# EAGLE board transceiver - Copy (EAGLE 6.4)
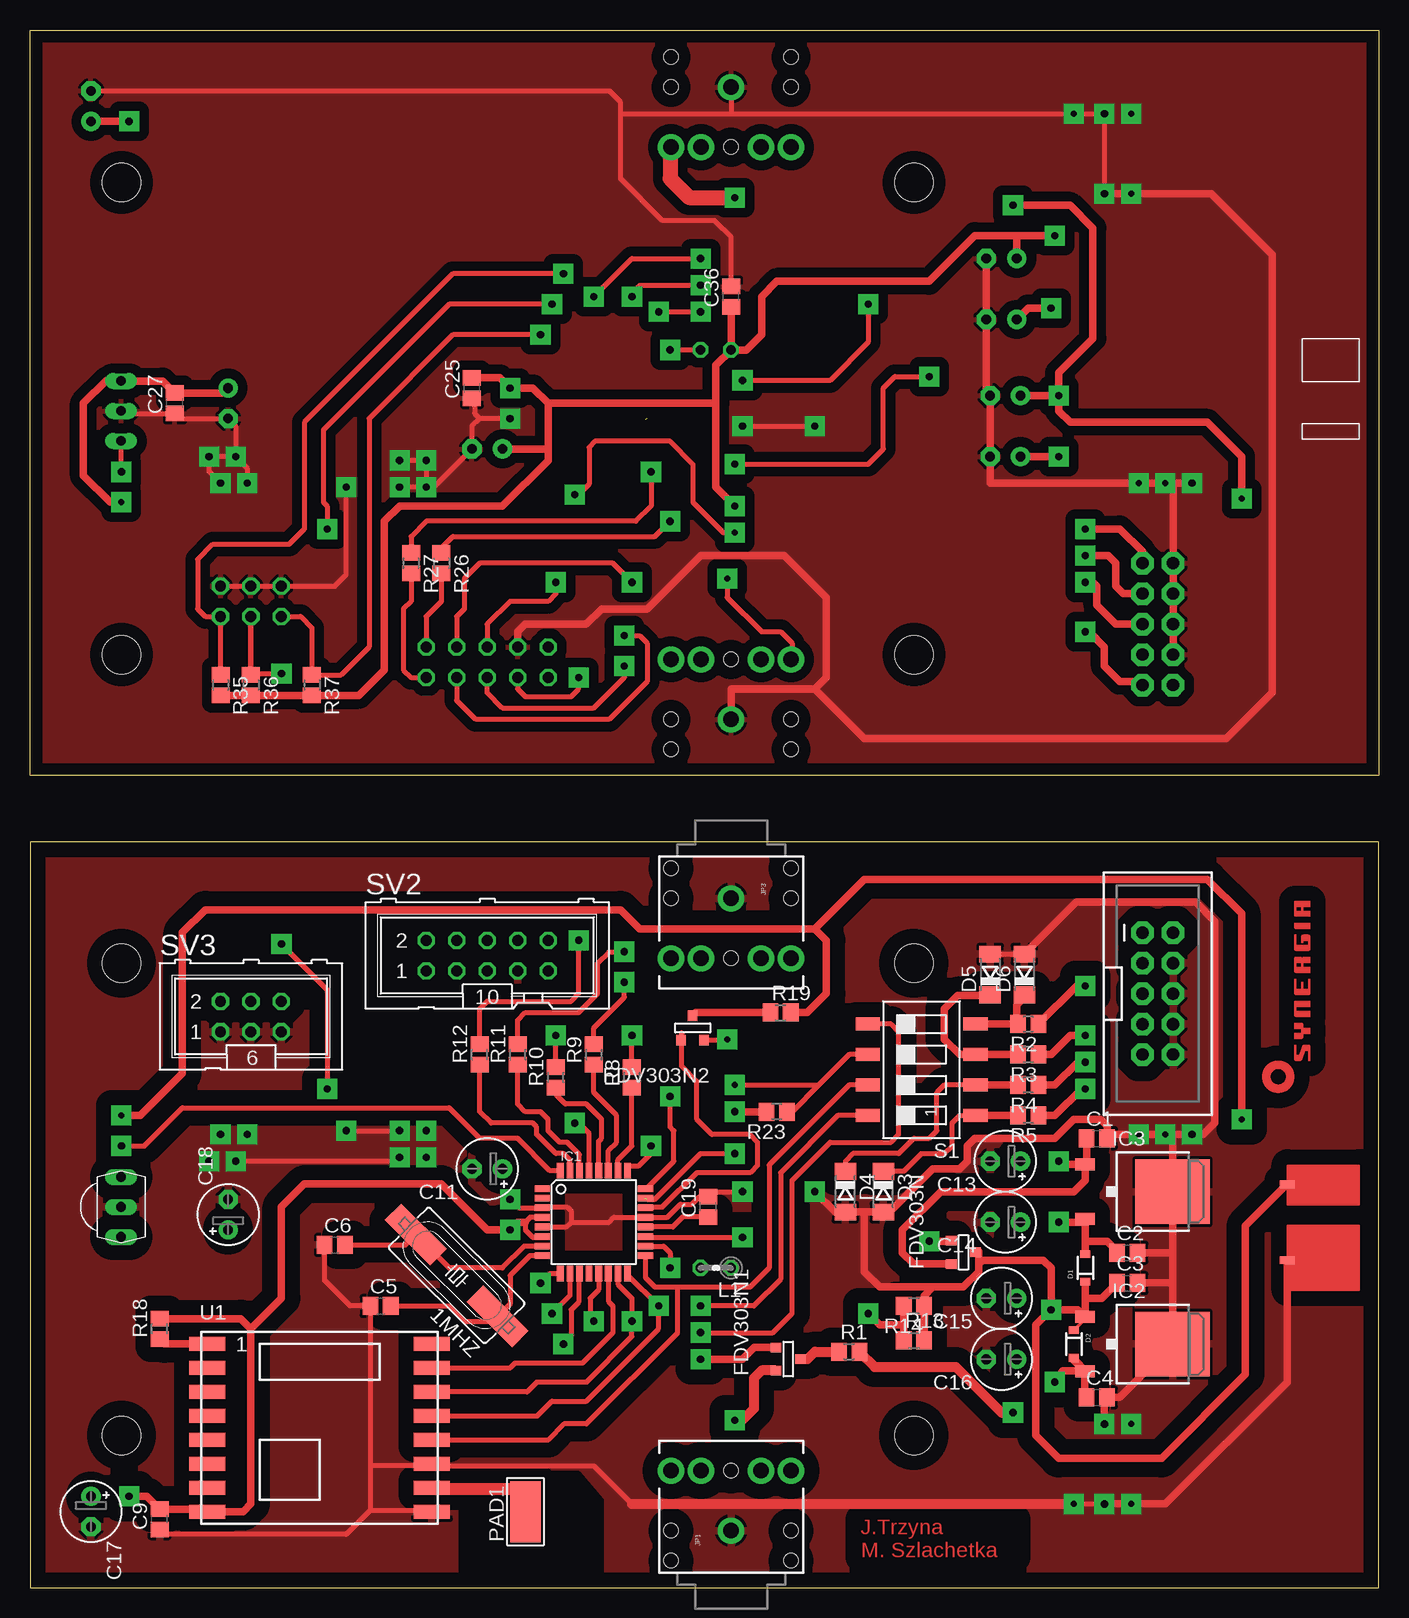
[diagram p0: board, top side]
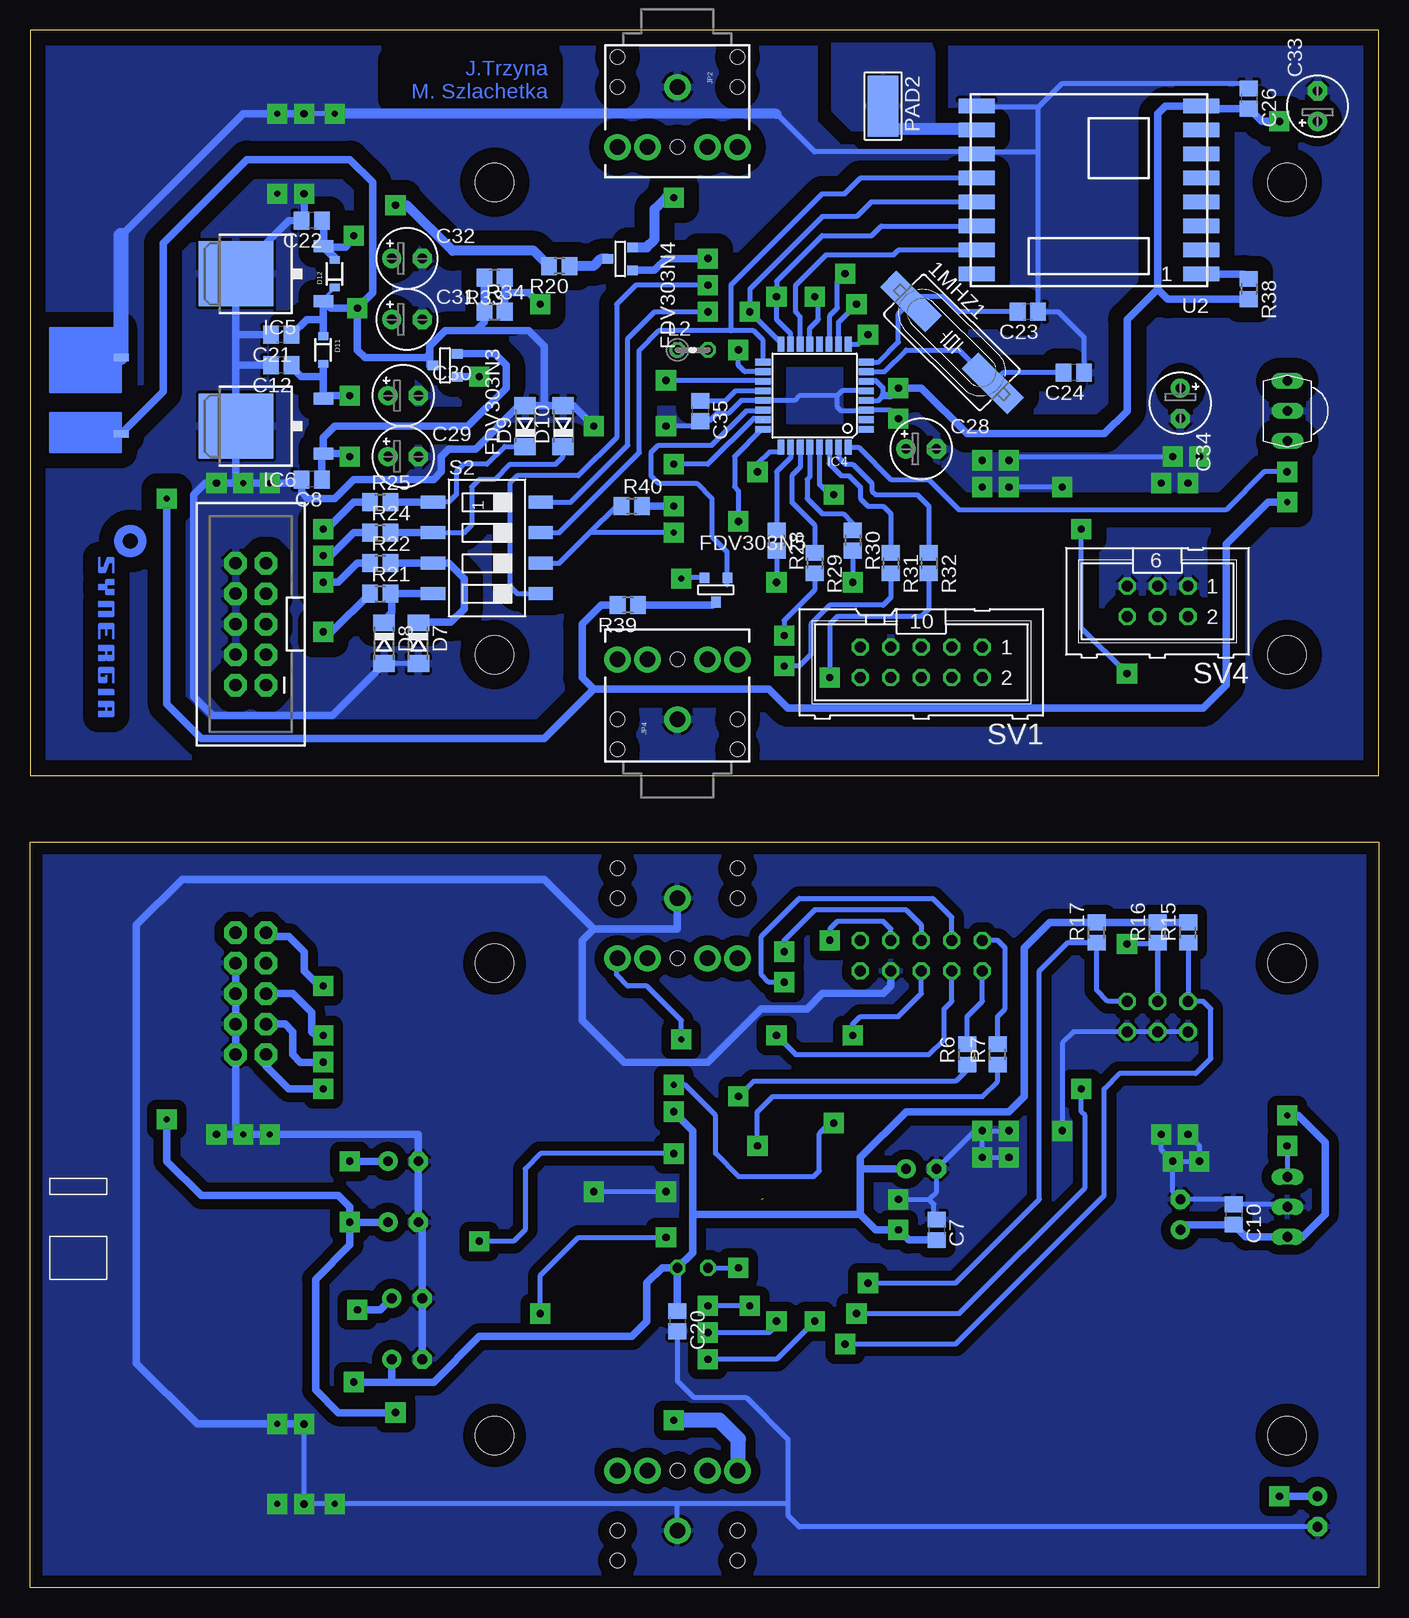
[diagram p1: board, bottom side, seen from below]

Size 112.38 x 129.86 mm. Coordinates in mm from the lower left corner, seen from the top.
Outline: 0,0 112.38,0 112.38,62.15 0,62.15 0,0
Outline: 0,129.86 112.38,129.86 112.38,67.7 0,67.7 0,129.86
Copper layers (1*16): Top 0.035mm / dielectric 1.5mm / Bottom 0.035mm
Design rules "default": minimum track width 10mil, minimum drill 24mil, track to track 8mil, track to pad 8mil, pad to pad 8mil, via to via 8mil, smd to smd 8mil, copper to edge 40mil, drill to drill 8mil, minimum pad ring 10mil, minimum via ring 8mil, stop-mask expansion 4mil, vias tented up to drill 0mil, thermal gap 10mil
Holes 3.2 mm at 7.62,52.07 7.62,12.7 73.66,12.7 73.66,52.07 7.62,77.79 7.62,117.16 73.66,117.16 73.66,77.79

## Footprints (pad centres in the part's own frame; a part is rotated, then mirrored left to right if it is on the bottom)
HC49UP = smd 5.334 x 1.93: 1 -4.826,0; 2 4.826,0
C0805 = smd 1.3 x 1.5: 1 -0.85,0; 2 0.85,0
E2,5-5 = drill 0.813 pad 1.6: + -1.27,0 | drill 0.813 pad 1.6 octagon: - 1.27,0
SOD-323 = smd 0.63 x 0.83: 1 -1.15,0; 2 1.15,0
SOD80C = smd 1.4 x 1.8: A 1.7,0; C -1.7,0
SOT-23 = smd 0.787 x 0.889: 1 0.025,-1.016; 2 -0.94,1.016; 3 0.991,1.016
TQFP32-08 = smd 1.27 x 0.559: 1 -4.293,2.8; 2 -4.293,2; 3 -4.293,1.2; 4 -4.293,0.4; 5 -4.293,-0.4; 6 -4.293,-1.2; 7 -4.293,-2; 8 -4.293,-2.8; 17 4.293,-2.8; 18 4.293,-2; 19 4.293,-1.2; 20 4.293,-0.4; 21 4.293,0.4; 22 4.293,1.2; 23 4.293,2; 24 4.293,2.8 | smd 0.559 x 1.27: 9 -2.8,-4.293; 10 -2,-4.293; 11 -1.2,-4.293; 12 -0.4,-4.293; 13 0.4,-4.293; 14 1.2,-4.293; 15 2,-4.293; 16 2.8,-4.293; 25 2.8,4.293; 26 2,4.293; 27 1.2,4.293; 28 0.4,4.293; 29 -0.4,4.293; 30 -1.2,4.293; 31 -2,4.293; 32 -2.8,4.293
TO252 = smd 1 x 1.6: 1 -2.28,-4.8; 2 2.28,-4.8 | smd 5.4 x 6.2: 3 0,2.5
AUDIO-JACK = drill 1.3 pad 2.184: RING 5,5; RSH 5,2.5; SLEEVE 0,0; TIP 5,-5; TSH 5,-2.5 | hole 1.2: 0,5; -2.5,5; -2.5,-5; 0,-5; 5,0
0204V = drill 0.813 octagon: 1 -1.27,0; 2 1.27,0
5-2,5 = smd 2.54 x 5.08: 1 0,0
R0805 = smd 1.3 x 1.5: 1 -0.85,0; 2 0.85,0
SMS-004 = smd 1.092 x 2.007: 1 -3.81,-4.496; 2 -1.27,-4.496; 3 1.27,-4.496; 4 3.81,-4.496; 5 3.81,4.496; 6 1.27,4.496; 7 -1.27,4.496; 8 -3.81,4.496
ML10 = drill 0.914 octagon: 1 -5.08,-1.27; 2 -5.08,1.27; 3 -2.54,-1.27; 4 -2.54,1.27; 5 0,-1.27; 6 0,1.27; 7 2.54,-1.27; 8 2.54,1.27; 9 5.08,-1.27; 10 5.08,1.27
ML6 = drill 0.914 octagon: 1 -2.54,-1.27; 2 -2.54,1.27; 3 0,-1.27; 4 0,1.27; 5 2.54,-1.27; 6 2.54,1.27
TSOP18XX = drill 0.813 long: GND -0.001,-0.027; OUT -2.501,-0.027; VCC 2.499,-0.027
RFM69W-XXXS2 = smd 3 x 1.2: 1 -9.35,7; 2 -9.35,5; 3 -9.35,3; 4 -9.35,1; 5 -9.35,-1; 6 -9.35,-3; 7 -9.35,-5; 8 -9.35,-7; 9 9.35,-7; 10 9.35,-5; 11 9.35,-3; 12 9.35,-1; 13 9.35,1; 14 9.35,3; 15 9.35,5; 16 9.35,7
DEANSM = smd 1.27 x 0.635: P$NEG 3.175,3.81; P$POS 3.175,-2.54
2X5-SHROUDED = drill 1.016 pad 1.88 octagon: 1 -1.27,5.08; 2 1.27,5.08; 3 -1.27,2.54; 4 1.27,2.54; 5 -1.27,0; 6 1.27,0; 7 -1.27,-2.54; 8 1.27,-2.54; 9 -1.27,-5.08; 10 1.27,-5.08

## Placement (x,y rotation side)
1MHZ  [HC49UP]  35.56,26.04 135 top
1MHZ1  [HC49UP]  35.56,103.82 315 bottom
C1  [C0805]  88.9,37.46 0 top
C2  [C0805]  91.44,27.94 0 top
C3  [C0805]  91.44,25.4 0 top
C4  [C0805]  88.9,15.88 0 top
C5  [C0805]  29.21,23.49 0 top
C6  [C0805]  25.4,28.57 0 top
C7  [C0805]  36.83,29.84 270 bottom
C8  [C0805]  88.9,92.39 180 bottom
C9  [C0805]  10.79,5.71 90 top
C10  [C0805]  12.06,31.11 270 bottom
C11  [E2,5-5]  38.1,34.92 180 top
C12  [C0805]  91.44,101.92 180 bottom
C13  [E2,5-5]  81.28,35.56 180 top
C14  [E2,5-5]  81.28,30.48 180 top
C15  [E2,5-5]  80.96,24.13 180 top
C16  [E2,5-5]  80.96,19.05 180 top
C17  [E2,5-5]  5.08,6.35 270 top
C18  [E2,5-5]  16.51,31.11 90 top
C19  [C0805]  56.52,31.75 90 top
C20  [C0805]  58.42,22.22 270 bottom
C21  [C0805]  91.44,104.46 180 bottom
C22  [C0805]  88.9,113.98 180 bottom
C23  [C0805]  29.21,106.36 180 bottom
C24  [C0805]  25.4,101.28 180 bottom
C25  [C0805]  36.83,100.01 90 top
C26  [C0805]  10.79,124.14 270 bottom
C27  [C0805]  12.06,98.74 90 top
C28  [E2,5-5]  38.1,94.93 0 bottom
C29  [E2,5-5]  81.28,94.3 0 bottom
C30  [E2,5-5]  81.28,99.38 0 bottom
C31  [E2,5-5]  80.96,105.73 0 bottom
C32  [E2,5-5]  80.96,110.81 0 bottom
C33  [E2,5-5]  5.08,123.51 90 bottom
C34  [E2,5-5]  16.51,98.74 270 bottom
C35  [C0805]  56.52,98.11 270 bottom
C36  [C0805]  58.42,107.63 90 top
D1  BAS16HT1G  [SOD-323]  87.95,26.67 90 top
D2  BAS16HT1G  [SOD-323]  87,20.32 270 top
D3  [SOD80C]  71.12,33.02 270 top
D4  [SOD80C]  67.94,33.02 270 top
D5  [SOD80C]  80.01,51.12 90 top
D6  [SOD80C]  82.87,51.12 90 top
D7  [SOD80C]  80.01,78.74 270 bottom
D8  [SOD80C]  82.87,78.74 270 bottom
D9  [SOD80C]  71.12,96.84 90 bottom
D10  [SOD80C]  67.94,96.84 90 bottom
D11  BAS16HT1G  [SOD-323]  87.95,103.19 270 bottom
D12  BAS16HT1G  [SOD-323]  87,109.54 90 bottom
FDV303N  [SOT-23]  77.79,27.94 90 top
FDV303N1  [SOT-23]  63.18,19.05 90 top
FDV303N2  [SOT-23]  55.24,46.67 180 top
FDV303N3  [SOT-23]  77.79,101.92 270 bottom
FDV303N4  [SOT-23]  63.18,110.81 270 bottom
FDV303N5  [SOT-23]  55.24,83.19 0 bottom
IC1  MEGA8-AI  [TQFP32-08]  46.99,30.48 0 top
IC2  LF33  [TO252]  92.71,20.32 270 top
IC3  LF50  [TO252]  92.71,33.02 270 top
IC4  MEGA8-AI  [TQFP32-08]  46.99,99.38 180 bottom
IC5  LF33  [TO252]  92.71,109.54 90 bottom
IC6  LF50  [TO252]  92.71,96.84 90 bottom
JP1  [AUDIO-JACK]  58.42,4.76 90 top
JP2  [AUDIO-JACK]  58.42,125.1 270 bottom
JP3  [AUDIO-JACK]  58.42,57.47 270 top
JP4  [AUDIO-JACK]  58.42,72.39 90 bottom
L1  [0204V]  57.15,26.67 180 top
L2  [0204V]  57.15,103.19 0 bottom
PAD1  WIREPADSMD5-2,5  [5-2,5]  41.27,6.35 0 top
PAD2  WIREPADSMD5-2,5  [5-2,5]  41.27,123.51 180 bottom
R1  36,5R  [R0805]  68.26,19.68 0 top
R2  [R0805]  83.19,46.99 180 top
R3  [R0805]  83.19,44.45 180 top
R4  [R0805]  83.19,41.91 180 top
R5  [R0805]  83.19,39.37 180 top
R6  [R0805]  34.29,44.45 90 bottom
R7  [R0805]  31.75,44.45 90 bottom
R8  [R0805]  50.16,42.55 90 top
R9  [R0805]  46.99,44.45 90 top
R10  [R0805]  43.81,42.55 90 top
R11  [R0805]  40.64,44.45 90 top
R12  [R0805]  37.47,44.45 90 top
R13  10k  [R0805]  73.66,20.64 0 top
R14  3,6k  [R0805]  73.66,23.49 180 top
R15  1k  [R0805]  15.88,54.61 90 bottom
R16  1k  [R0805]  18.41,54.61 90 bottom
R17  1k  [R0805]  23.5,54.61 90 bottom
R18  10k  [R0805]  10.79,21.59 90 top
R19  [R0805]  62.55,47.94 0 top
R20  36,5R  [R0805]  68.26,110.17 180 bottom
R21  [R0805]  83.19,82.87 0 bottom
R22  [R0805]  83.19,85.41 0 bottom
R23  1k  [R0805]  62.23,39.69 180 top
R24  [R0805]  83.19,87.95 0 bottom
R25  [R0805]  83.19,90.49 0 bottom
R26  [R0805]  34.29,85.41 270 top
R27  [R0805]  31.75,85.41 270 top
R28  [R0805]  50.16,87.31 270 bottom
R29  [R0805]  46.99,85.41 270 bottom
R30  [R0805]  43.81,87.31 270 bottom
R31  [R0805]  40.64,85.41 270 bottom
R32  [R0805]  37.47,85.41 270 bottom
R33  10k  [R0805]  73.66,109.22 180 bottom
R34  3,6k  [R0805]  73.66,106.36 0 bottom
R35  1k  [R0805]  15.88,75.25 270 top
R36  1k  [R0805]  18.41,75.25 270 top
R37  1k  [R0805]  23.5,75.25 270 top
R38  10k  [R0805]  10.79,108.27 270 bottom
R39  [R0805]  62.55,81.92 180 bottom
R40  1k  [R0805]  62.23,90.17 0 bottom
S1  SWS004  [SMS-004]  74.3,43.18 90 top
S2  SWS004  [SMS-004]  74.3,86.68 270 bottom
SV1  [ML10]  38.1,77.15 180 bottom
SV2  [ML10]  38.1,52.7 0 top
SV3  [ML6]  18.41,47.62 0 top
SV4  [ML6]  18.41,82.23 180 bottom
TSOP  TSOP4836  [TSOP18XX]  7.62,31.75 270 top
TSOP1  TSOP4836  [TSOP18XX]  7.62,98.11 90 bottom
U1  RFM69HW  [RFM69W-XXXS2]  24.13,13.34 0 top
U2  RFM69HW  [RFM69W-XXXS2]  24.13,116.52 180 bottom
U$1  DEANS.MALE  [DEANSM]  107.95,31.11 180 top
U$2  AVR_SPI_PROG2PTH2  [2X5-SHROUDED]  93.98,49.53 0 top
U$3  [SYNERGIA_16MM]  106.68,41.27 90 top
U$4  DEANS.MALE  [DEANSM]  107.95,98.74 0 bottom
U$5  AVR_SPI_PROG2PTH2  [2X5-SHROUDED]  93.98,80.33 180 bottom
U$6  [SYNERGIA_16MM]  106.68,88.58 270 bottom

## Library data of the parts
1MHZ 1MHZ1 = crystal; OC_FARNELL: unknown; OC_NEWARK: unknown
C1-C10 C12 C19-C27 C35 C36 L1 L2 R1-R40 = resistor
C11 C13-C18 C28-C34 = rcl
D1 D2 D11 D12 U$2 U$5 = SparkFun
D3-D10 = diode
FDV303N FDV303N1-FDV303N5 = zetex; OC_FARNELL: unknown; OC_NEWARK: unknown
IC1 IC4 = atmel; MPN: ATMEGA8-16AU; OC_FARNELL: 9171371; OC_NEWARK: 73M8863
IC2 IC3 IC5 IC6 = linear
JP1-JP4 = SparkFun-Connectors
PAD1 PAD2 = wirepad
S1 S2 = smd-special
SV1-SV4 = con-harting-ml; OC_FARNELL: unknown; OC_NEWARK: unknown
TSOP TSOP1 = tsop
U1 U2 = SparkFun-RF
U$1 U$4 = bt_electromech
U$3 U$6 = synergia_logo

## Nets
5V_ENABLE: FDV303N.3 IC1.23
5V_ENABLE1: FDV303N3.3 IC4.23
$1S1: C1.2 C2.2 C3.2 C4.2 C5.1 C6.1 C7.1 C9.1 C10.1 C11.- C13.- C14.- C15.- C16.- C17.- C18.- C19.2 C20.2 D3.A D4.A D5.A D6.A IC1.3 IC1.5 IC1.21 IC2.3 IC3.3 JP1.SLEEVE JP3.SLEEVE R14.1 SV2.7 SV3.1 SV3.3 SV3.5 TSOP.GND U1.9 U1.11 U$1.P$NEG U$2.4 U$2.6 U$2.8 U$2.10
$1S2: C8.2 C12.2 C21.2 C22.2 C23.1 C24.1 C25.1 C26.1 C27.1 C28.- C29.- C30.- C31.- C32.- C33.- C34.- C35.2 C36.2 D7.A D8.A D9.A D10.A IC4.3 IC4.5 IC4.21 IC5.3 IC6.3 JP2.SLEEVE JP4.SLEEVE R34.1 SV1.7 SV4.1 SV4.3 SV4.5 TSOP1.GND U2.9 U2.11 U$4.P$NEG U$5.4 U$5.6 U$5.8 U$5.10
+3V1: C22.1 C25.2 C26.2 C28.+ C32.+ C33.+ C36.1 D12.2 IC4.4 IC4.6 IC5.2 L2.1 R35.2 R36.2 R37.2 R38.2 R40.2 U2.8
+3V3: C4.1 C7.2 C9.2 C11.+ C16.+ C17.+ C20.1 D2.2 IC1.4 IC1.6 IC2.2 L1.1 R15.2 R16.2 R17.2 R18.2 R23.2 U1.8
+5V: C2.1 C10.2 C14.+ C18.+ D1.2 IC3.2 R1.2 R19.2 TSOP.VCC
+5V1: C12.1 C27.2 C30.+ C34.+ D11.2 IC6.2 R20.2 R39.2 TSOP1.VCC
ADC: IC1.19 R13.1 R14.2
ADC1: IC4.19 R33.1 R34.2
LED1: IC1.24 R6.1
LED2: IC1.25 R7.1
LED3: IC1.26 R8.1
LED4: IC1.27 R9.1
LED5: IC1.28 R10.1
LED6: IC4.24 R26.1
LED7: IC4.25 R27.1
LED8: IC4.26 R28.1
LED9: IC4.27 R29.1
LED10: IC4.28 R30.1
LED_BATT_GR: IC1.30 R11.1
LED_BATT_GR1: IC4.30 R31.1
LED_BATT_RED: IC1.31 R12.1
LED_BATT_RED1: IC4.31 R32.1
LED_STRIPE: FDV303N2.3 IC1.22
LED_STRIPE1: FDV303N5.3 IC4.22
MISO: IC1.16 S1.8 U1.13
MISO1: IC4.16 S2.8 U2.13
MOSI: IC1.15 S1.5 U1.14
MOSI1: IC4.15 S2.5 U2.14
N$1: C1.1 C13.+ FDV303N.2 IC3.1
N$2: IC1.18 L1.2
N$3: C8.1 C29.+ FDV303N3.2 IC6.1
N$4: R2.1 U$2.1
N$5: R3.1 U$2.5
N$6: R4.1 U$2.7
N$7: R5.1 U$2.9
N$8: FDV303N1.1 R1.1
N$9: R6.2 SV2.1
N$10: R7.2 SV2.2
N$11: R8.2 SV2.3
N$12: R9.2 SV2.4
N$13: R10.2 SV2.5
N$14: 1MHZ.2 C6.2 IC1.7
N$15: 1MHZ.1 C5.2 IC1.8
N$16: R11.2 SV2.6
N$17: R12.2 SV2.8
N$19: R21.1 U$5.1
N$20: R22.1 U$5.5
N$21: R18.1 U1.1
N$22: R24.1 U$5.7
N$23: FDV303N1.2 JP1.RING
N$24: FDV303N2.2 JP3.RING
N$25: FDV303N2.1 R19.1
N$26: C19.1 IC1.20
N$27: C3.1 C15.+ D1.1 D2.1 FDV303N.1 IC2.1 R13.2 U$1.P$POS
N$28: PAD1.1 U1.10
N$29: D6.C R2.2 S1.4
N$30: D5.C R3.2 S1.3
N$31: D4.C R4.2 S1.2
N$32: D3.C R5.2 S1.1
N$33: R25.1 U$5.9
N$34: 1MHZ1.2 C24.2 IC4.7
N$35: 1MHZ1.1 C23.2 IC4.8
N$36: R38.1 U2.1
N$37: FDV303N4.2 JP2.RING
N$38: FDV303N5.2 JP4.RING
N$39: FDV303N5.1 R39.1
N$40: FDV303N4.1 R20.1
N$41: C21.1 C31.+ D11.1 D12.1 FDV303N3.1 IC5.1 R33.2 U$4.P$POS
N$42: IC4.18 L2.2
N$43: C35.1 IC4.20
N$44: PAD2.1 U2.10
N$45: R26.2 SV1.1
N$46: R27.2 SV1.2
N$47: R28.2 SV1.3
N$48: R29.2 SV1.4
N$49: R30.2 SV1.5
N$50: R31.2 SV1.6
N$51: R32.2 SV1.8
N$52: D8.C R21.2 S2.4
N$53: D7.C R22.2 S2.3
N$54: D10.C R24.2 S2.2
N$55: D9.C R25.2 S2.1
RESET: IC1.29 R23.1 S1.6
RESET1: IC4.29 R40.1 S2.6
SCK: IC1.17 S1.7 U1.12
SCK1: IC4.17 S2.7 U2.12
SS: IC1.14 U1.15
SS1: IC4.14 U2.15
SWITCH_DOWN: IC1.11 R15.1 SV3.2
SWITCH_DOWN1: IC4.11 R35.1 SV4.2
SWITCH_OK: IC1.10 R16.1 SV3.4
SWITCH_OK1: IC4.10 R36.1 SV4.4
SWITCH_UP: IC1.9 R17.1 SV3.6
SWITCH_UP1: IC4.9 R37.1 SV4.6
TSAL_ENABLE: FDV303N1.3 IC1.13
TSAL_ENABLE1: FDV303N4.3 IC4.13
TSOP_OUT: IC1.32 TSOP.OUT
TSOP_OUT1: IC4.32 TSOP1.OUT

## Tracks (layer width: path | path; a pad name or v marks a point on that pad's centre or on a via)
5V_ENABLE  (via drill 0.6 pad 1.68)  (1 unrouted)
  Top 0.254: 51.38,32.38 51.44,32.38
  Top 0.406: 51.44,32.38 52.07,32.38 55.88,36.2 v58.74,36.2
  Top 0.61: FDV303N.3 76.73,28.89 v74.93,28.89
  Bottom 0.406: v58.74,36.2 69.85,36.2 71.12,34.92 71.12,29.84 72.07,28.89 v74.93,28.89
5V_ENABLE1  (via drill 0.6 pad 1.68)  (1 unrouted)
  Top 0.406: v58.74,93.66 69.85,93.66 71.12,94.93 71.12,100.01 72.07,100.97 v74.93,100.97
  Bottom 0.254: 51.38,97.47 51.44,97.47
  Bottom 0.406: 51.44,97.47 52.07,97.47 55.88,93.66 v58.74,93.66
  Bottom 0.61: FDV303N3.3 76.73,100.97 v74.93,100.97
$1S1  (via drill 0.5 pad 1.68, 0.6 pad 1.68)
  Top 0.254: 90.13,16.51 C4.2 | IC1.3 42.77,31.75 | 40.64,31.75 40.71,31.68
  Top 0.305: IC3.3 95.21,31.75 | 93.94,20.32 IC2.3 | 56.73,33.02 C19.2 55.78,32.6 | 33.3,10.16 U1.11 33.66,10.16 | 11.21,4.45 C9.1 | 33.36,6.45 U1.9
  Top 0.406: 45.09,30.48 48.26,30.48 48.66,30.88 IC1.21 53.1,30.88 54.19,31.96 55.14,31.96 55.78,32.6 | 40.71,31.68 IC1.3 | 56.73,33.02 v59.37,33.02 | 50.16,6.99 46.99,10.16 33.66,10.16 | v87,6.99 v89.53,6.99 | 40.64,31.75 v40.01,32.38 | IC1.5 44.69,30.08 45.09,30.48 | C6.1 24.55,25.61 26.67,23.49 C5.1 28.36,10.16 | v30.8,35.88 30.48,35.56 v17.14,35.56 | v26.35,38.1 v30.8,38.1 | 28.36,10.16 28.36,6.45 | 28.36,6.45 26.35,4.45 11.21,4.45 | 28.36,6.45 33.36,6.45 | 33.3,10.16 28.36,10.16 | 42.77,31.75 44.77,31.75 45.09,31.43 45.09,30.48 | D5.A D6.A
  Top 0.61: 95.21,37.78 v96.84,37.78 97.79,37.78 98.74,38.73 98.74,55.56 97.16,57.15 87.2,57.15 D6.A | 95.21,37.78 v94.61,37.78 v92.39,37.78 89.75,37.78 C1.2 89.75,38.52 89.22,39.05 87,39.05 85.41,37.46 78.74,37.46 78.11,36.83 78.11,35.56 77.47,34.92 75.25,34.92 71.64,31.32 D3.A 69.53,31.32 | 95.21,37.78 IC3.3 | 95.21,31.75 95.21,27.94 | 95.21,27.94 95.21,25.4 | 95.21,25.4 IC2.3 | C3.2 95.21,25.4 | C2.2 95.21,27.94 | R14.1 74.51,24.34 75.25,25.08 70.8,25.08 69.53,26.35 69.53,31.32 | v89.53,13.65 89.53,15.66 C4.2 90.81,15.88 93.94,19.01 93.94,20.32 | v65.41,33.02 67.11,31.32 D4.A 69.53,31.32 | U$1.P$NEG 104.78,17.14 94.61,6.99 v91.76,6.99 v89.53,6.99
  Top 0.813: 50.16,6.99 v87,6.99
  Bottom 0.254: 11.85,31.75 C10.1
  Bottom 0.305: C10.1 12.48,32.38 | 37.05,30.7 C7.1 36.83,30.48
  Bottom 0.406: v89.53,13.65 v89.53,6.99 v87,6.99 58.42,6.99 | TSOP.GND 7.81,31.96 C10.1 | 12.48,32.38 C18.- 17.14,33.02 v17.14,35.56 | C20.2 58.42,17.25 57.05,15.88 52.7,15.88 49.21,12.38 49.21,6.99 | 49.21,6.99 58.42,6.99 | v59.37,33.02 v65.41,33.02 | v40.01,32.38 37.47,32.38 | 37.47,32.38 36.83,33.02 C11.- 33.66,38.1 v33.02,38.1 | 37.05,30.7 37.05,31.96 37.47,32.38 | v17.14,35.56 v14.92,35.56 14.92,36.83 v15.88,37.78 | v17.14,35.56 18.1,36.51 v18.1,37.78 | v30.8,35.88 v33.02,35.88 v33.02,38.1 | v33.02,38.1 v30.8,38.1 | C17.- 48.26,5.08 49.21,6.03 49.21,6.99 | SV3.5 SV3.3 SV3.1 25.4,46.35 26.35,45.4 v26.35,38.1 | JP1.SLEEVE 58.42,6.99
  Bottom 0.61: U$2.4 U$2.6 U$2.8 U$2.10 95.25,37.78 | 95.25,37.78 v94.61,37.78 v92.39,37.78 80.01,37.78 C13.- C14.- 79.69,30.16 C15.- C16.- | SV2.7 40.64,50.16 41.27,49.53 46.35,49.53 47.62,48.26 51.44,48.26 55.88,43.81 62.87,43.81 66.36,47.31 66.36,53.98 65.41,54.93 | 95.25,37.78 v96.84,37.78 | JP3.SLEEVE 58.42,54.93 65.41,54.93 | 65.41,54.93 69.53,59.05 99.69,59.05 103.5,55.24 103.5,18.73 98.42,13.65 v91.76,13.65 v89.53,13.65
  pour Bottom (isolate 0.813): -0.64,62.87 113.03,63.82 113.98,-0.95 -2.22,-0.95 -4.45,63.18
  pour Top (isolate 1.27): -0.95,63.5 -0.95,-2.22 115.25,-1.59 115.25,63.5
$1S2  (via drill 0.5 pad 1.68, 0.6 pad 1.68)
  Top 0.254: 11.85,98.11 C27.1
  Top 0.305: C27.1 12.48,97.47 | 37.05,99.16 C25.1 36.83,99.38
  Top 0.406: v89.53,116.21 v89.53,122.87 v87,122.87 58.42,122.87 | TSOP1.GND 7.81,97.89 C27.1 | 12.48,97.47 C34.- 17.14,96.84 v17.14,94.3 | C36.2 58.42,112.61 57.05,113.98 52.7,113.98 49.21,117.48 49.21,122.87 | 49.21,122.87 58.42,122.87 | v59.37,96.84 v65.41,96.84 | v40.01,97.47 37.47,97.47 | 37.47,97.47 36.83,96.84 C28.- 33.66,91.76 v33.02,91.76 | 37.05,99.16 37.05,97.89 37.47,97.47 | v17.14,94.3 v14.92,94.3 14.92,93.03 v15.88,92.08 | v17.14,94.3 18.1,93.35 v18.1,92.08 | v30.8,93.98 v33.02,93.98 v33.02,91.76 | v33.02,91.76 v30.8,91.76 | C33.- 48.26,124.78 49.21,123.83 49.21,122.87 | SV4.5 SV4.3 SV4.1 25.4,83.5 26.35,84.46 v26.35,91.76 | JP2.SLEEVE 58.42,122.87
  Top 0.61: U$5.4 U$5.6 U$5.8 U$5.10 95.25,92.08 | 95.25,92.08 v94.61,92.08 v92.39,92.08 80.01,92.08 C29.- C30.- 79.69,99.7 C31.- C32.- | SV1.7 40.64,79.69 41.27,80.33 46.35,80.33 47.62,81.6 51.44,81.6 55.88,86.04 62.87,86.04 66.36,82.55 66.36,75.88 65.41,74.93 | 95.25,92.08 v96.84,92.08 | JP4.SLEEVE 58.42,74.93 65.41,74.93 | 65.41,74.93 69.53,70.8 99.69,70.8 103.5,74.61 103.5,111.12 98.42,116.21 v91.76,116.21 v89.53,116.21
  Bottom 0.254: 90.13,113.35 C22.2 | IC4.3 42.77,98.11 | 40.64,98.11 40.71,98.18
  Bottom 0.305: IC6.3 95.21,98.11 | 93.94,109.54 IC5.3 | 56.73,96.84 C35.2 55.78,97.26 | 33.3,119.7 U2.11 33.66,119.7 | 11.21,125.41 C26.1 | 33.36,123.41 U2.9
  Bottom 0.406: 45.09,99.38 48.26,99.38 48.66,98.98 IC4.21 53.1,98.98 54.19,97.89 55.14,97.89 55.78,97.26 | 40.71,98.18 IC4.3 | 56.73,96.84 v59.37,96.84 | 50.16,122.87 46.99,119.7 33.66,119.7 | v87,122.87 v89.53,122.87 | 40.64,98.11 v40.01,97.47 | IC4.5 44.69,99.78 45.09,99.38 | C24.1 24.55,104.24 26.67,106.36 C23.1 28.36,119.7 | v30.8,93.98 30.48,94.3 v17.14,94.3 | v26.35,91.76 v30.8,91.76 | 28.36,119.7 28.36,123.41 | 28.36,123.41 26.35,125.41 11.21,125.41 | 28.36,123.41 33.36,123.41 | 33.3,119.7 28.36,119.7 | 42.77,98.11 44.77,98.11 45.09,98.43 45.09,99.38 | D7.A D8.A
  Bottom 0.61: 95.21,92.08 v96.84,92.08 97.79,92.08 98.74,91.12 98.74,74.3 97.16,72.71 87.2,72.71 D8.A | 95.21,92.08 v94.61,92.08 v92.39,92.08 89.75,92.08 C8.2 89.75,91.34 89.22,90.81 87,90.81 85.41,92.39 78.74,92.39 78.11,93.03 78.11,94.3 77.47,94.93 75.25,94.93 71.64,98.54 D9.A 69.53,98.54 | 95.21,92.08 IC6.3 | 95.21,98.11 95.21,101.92 | 95.21,101.92 95.21,104.46 | 95.21,104.46 IC5.3 | C21.2 95.21,104.46 | C12.2 95.21,101.92 | R34.1 74.51,105.51 75.25,104.78 70.8,104.78 69.53,103.51 69.53,98.54 | v89.53,116.21 89.53,114.2 C22.2 90.81,113.98 93.94,110.85 93.94,109.54 | v65.41,96.84 67.11,98.54 D10.A 69.53,98.54 | 104.78,112.71 94.61,122.87 v91.76,122.87 v89.53,122.87
  Bottom 0.813: 50.16,122.87 v87,122.87
  Bottom 1.27: U$4.P$NEG 104.78,112.71
  pour Top (isolate 0.813): -0.64,66.99 113.03,66.04 113.98,130.81 -2.22,130.81 -4.45,66.68
  pour Bottom (isolate 1.27): -0.95,66.36 -1.27,131.44 115.25,131.13 115.25,66.36
+3V1  (via drill 0.6 pad 1.68)
  Top 0.61: L2.1 59.69,103.19 60.96,104.46 60.96,107.63 62.23,108.9 74.93,108.9 78.74,112.71 82.23,112.71 | L2.1 C36.1 | v58.74,90.17 57.15,91.76 57.15,98.74 | 43.18,98.74 41.91,100.01 v40.01,100.01 39.16,100.86 C25.2 | 57.15,98.74 43.18,98.74 | L2.1 57.15,101.92 57.15,98.74 | 82.23,112.71 v85.41,112.71 | C32.+ 82.23,112.71 | C33.+ v8.26,122.24 | 43.18,98.74 43.18,94.93 | 43.18,94.93 43.18,93.98 39.37,90.17 30.8,90.17 29.53,88.9 29.53,76.52 27.41,74.4 R37.2 R36.2 R35.2 | C28.+ 43.18,94.93
  Bottom 0.254: 14.79,123.51 U2.8
  Bottom 0.305: 87.91,111.6 IC5.2 | U2.8 14.55,123.29 | IC4.6 42.63,100.65
  Bottom 0.406: IC4.4 41.67,98.98 41.27,99.38 41.27,100.01 41.91,100.65 42.63,100.65
  Bottom 0.61: 18.41,108.27 17.57,107.42 R38.2 | 18.41,108.27 18.41,122.87 17.78,123.51 14.79,123.51 | 14.55,123.29 C26.2 9.74,122.24 v8.26,122.24 | 41.27,99.38 40.64,99.38 v40.01,100.01 38.1,100.01 34.29,96.2 22.86,96.2 20.95,98.11 20.95,105.73 18.41,108.27 | C22.1 87.91,113.84 IC5.2 87,110.9 | D12.2 87,110.9 | 87,110.9 87.09,110.9 87.95,111.76 86.04,111.76 v85.41,112.71 | R40.2 v58.74,90.17
+3V3  (via drill 0.6 pad 1.68)
  Top 0.254: 14.79,6.35 U1.8
  Top 0.305: 87.91,18.25 IC2.2 | U1.8 14.55,6.57 | IC1.6 42.63,29.21
  Top 0.406: IC1.4 41.67,30.88 41.27,30.48 41.27,29.84 41.91,29.21 42.63,29.21
  Top 0.61: 18.41,21.59 17.57,22.44 R18.2 | 18.41,21.59 18.41,6.99 17.78,6.35 14.79,6.35 | 14.55,6.57 C9.2 9.74,7.62 v8.26,7.62 | 41.27,30.48 40.64,30.48 v40.01,29.84 38.1,29.84 34.29,33.66 22.86,33.66 20.95,31.75 20.95,24.13 18.41,21.59 | C4.1 87.91,16.02 IC2.2 87,18.95 | D2.2 87,18.95 | 87,18.95 87.09,18.95 87.95,18.1 86.04,18.1 v85.41,17.14 | R23.2 v58.74,39.69
  Bottom 0.61: L1.1 59.69,26.67 60.96,25.4 60.96,22.22 62.23,20.95 74.93,20.95 78.74,17.14 82.23,17.14 | L1.1 C20.1 | v58.74,39.69 57.15,38.1 57.15,31.11 | 43.18,31.11 41.91,29.84 v40.01,29.84 39.16,28.99 C7.2 | 57.15,31.11 43.18,31.11 | L1.1 57.15,27.94 57.15,31.11 | 82.23,17.14 v85.41,17.14 | C16.+ 82.23,17.14 | C17.+ v8.26,7.62 | 43.18,31.11 43.18,34.92 | 43.18,34.92 43.18,35.88 39.37,39.69 30.8,39.69 29.53,40.96 29.53,53.34 27.41,55.46 R17.2 R16.2 R15.2 | C11.+ 43.18,34.92
+5V  (via drill 0.5 pad 1.68, 0.6 pad 1.68)
  Top 0.254: IC3.2 87.65,30.48 | 90.59,28.06 C2.1
  Top 0.61: v85.72,30.48 87.65,30.48 arc90 IC3.2 arc90 87.95,30.78 87.95,28.89 | D1.2 87.95,28.89 | 90.59,28.06 89.76,28.89 87.95,28.89 | v7.62,39.37 9.21,39.37 12.7,42.86 12.7,54.61 14.61,56.52 49.21,56.52 50.8,54.93 65.41,54.93 | 65.41,54.93 69.53,59.05 98.11,59.05 100.97,56.2 v100.97,39.05 | 65.41,54.93 66.36,53.98 66.36,49.53 64.77,47.94 R19.2
  Top 0.813: R1.2 70.38,18.41 77.15,18.41 80.96,14.61 v81.92,14.61
  Bottom 0.61: C18.+ 16.09,30.27 C10.2 11.05,29.25 TSOP.VCC 7.55,29.21 6.35,29.21 4.45,31.11 4.45,37.15 6.67,39.37 v7.62,39.37 | C14.+ v85.72,30.48 | v85.72,30.48 85.72,28.57 88.58,25.72 88.58,16.51 86.68,14.61 v81.92,14.61 | v100.97,39.05 100.97,35.56 98.11,32.7 86.68,32.7 85.72,31.75 v85.72,30.48
+5V1  (via drill 0.5 pad 1.68, 0.6 pad 1.68)
  Top 0.61: C34.+ 16.09,99.59 C27.2 11.05,100.61 TSOP1.VCC 7.55,100.65 6.35,100.65 4.45,98.74 4.45,92.71 6.67,90.49 v7.62,90.49 | C30.+ v85.72,99.38 | v85.72,99.38 85.72,101.28 88.58,104.14 88.58,113.35 86.68,115.25 v81.92,115.25 | v100.97,90.81 100.97,94.3 98.11,97.16 86.68,97.16 85.72,98.11 v85.72,99.38
  Bottom 0.254: IC6.2 87.65,99.38 | 90.59,101.8 C12.1
  Bottom 0.61: v85.72,99.38 87.65,99.38 arc-90 IC6.2 arc-90 87.95,99.08 87.95,100.97 | D11.2 87.95,100.97 | 90.59,101.8 89.76,100.97 87.95,100.97 | v7.62,90.49 9.21,90.49 12.7,87 12.7,75.25 14.61,73.34 49.21,73.34 50.8,74.93 65.41,74.93 | 65.41,74.93 69.53,70.8 98.11,70.8 100.97,73.66 v100.97,90.81 | 65.41,74.93 66.36,75.88 66.36,80.33 64.77,81.92 R39.2
  Bottom 0.813: R20.2 70.38,111.44 77.15,111.44 80.96,115.25 v81.92,115.25
ADC  (via drill 0.6 pad 1.68)
  Top 0.305: IC1.19 51.35,29.21
  Top 0.406: 51.35,29.21 v59.37,29.21
  Top 0.61: R14.2 72.81,21.91 | 72.81,21.91 R13.1 | v69.85,22.86 70.8,21.91 72.81,21.91
  Bottom 0.406: v69.85,22.86 69.85,26.04 66.67,29.21 v59.37,29.21
ADC1  (via drill 0.6 pad 1.68)
  Top 0.406: v69.85,107 69.85,103.82 66.67,100.65 v59.37,100.65
  Bottom 0.305: IC4.19 51.35,100.65
  Bottom 0.406: 51.35,100.65 v59.37,100.65
  Bottom 0.61: R34.2 72.81,107.95 | 72.81,107.95 R33.1 | v69.85,107 70.8,107.95 72.81,107.95
LED1  (via drill 0.6 pad 1.68)
  Top 0.305: IC1.24 51.38,33.28
  Top 0.406: 51.38,33.28 53.66,35.56 53.66,38.1 53.34,38.42 v53.34,40.96
  Bottom 0.406: R6.1 34.29,43.18 35.24,42.23 52.07,42.23 v53.34,40.96
LED2  (via drill 0.6 pad 1.68)
  Top 0.305: IC1.25 49.79,35.19
  Top 0.406: 49.79,35.19 50.74,35.19 51.75,36.2 v51.75,36.83
  Bottom 0.406: v51.75,36.83 51.75,39.69 50.48,40.96 33.02,40.96 31.75,42.23 R7.1
LED3
  Top 0.406: IC1.26 48.99,35.66 50.16,36.83 R8.1
LED4
  Top 0.406: IC1.27 48.19,36.44 48.9,37.15 48.9,39.37 46.99,41.27 R9.1
LED5
  Top 0.406: R10.1 43.88,41.06 44.62,40.32 46.35,40.32 47.62,39.05 47.62,37.46 47.39,37.23 IC1.28
LED6  (via drill 0.6 pad 1.68)
  Top 0.406: R26.1 34.29,86.68 35.24,87.63 52.07,87.63 v53.34,88.9
  Bottom 0.305: IC4.24 51.38,96.58
  Bottom 0.406: 51.38,96.58 53.66,94.3 53.66,91.76 53.34,91.44 v53.34,88.9
LED7  (via drill 0.6 pad 1.68)
  Top 0.406: v51.75,93.03 51.75,90.17 50.48,88.9 33.02,88.9 31.75,87.63 R27.1
  Bottom 0.305: IC4.25 49.79,94.67
  Bottom 0.406: 49.79,94.67 50.74,94.67 51.75,93.66 v51.75,93.03
LED8
  Bottom 0.406: IC4.26 48.99,94.2 50.16,93.03 R28.1
LED9
  Bottom 0.406: IC4.27 48.19,93.42 48.9,92.71 48.9,90.49 46.99,88.58 R29.1
LED10
  Bottom 0.406: R30.1 43.88,88.8 44.62,89.54 46.35,89.54 47.62,90.81 47.62,92.39 47.39,92.63 IC4.28
LED_BATT_GR
  Top 0.406: IC1.30 45.79,36.12 44.77,37.15 44.13,37.15 43.18,38.1 43.18,39.05 42.55,39.69 41.27,39.69 40.64,40.32 R11.1
LED_BATT_GR1
  Bottom 0.406: IC4.30 45.79,93.73 44.77,92.71 44.13,92.71 43.18,91.76 43.18,90.81 42.55,90.17 41.27,90.17 40.64,89.54 R31.1
LED_BATT_RED
  Top 0.406: IC1.31 44.99,35.66 44.45,36.2 43.81,36.2 42.23,37.78 42.23,38.42 41.91,38.73 38.42,38.73 37.47,39.69 R12.1
LED_BATT_RED1
  Bottom 0.406: IC4.31 44.99,94.2 44.45,93.66 43.81,93.66 42.23,92.08 42.23,91.44 41.91,91.12 38.42,91.12 37.47,90.17 R32.1
LED_STRIPE
  Top 0.305: IC1.22 51.35,31.75
  Top 0.406: 51.35,31.75 52.7,31.75 55.56,34.61 60.01,34.61 60.64,35.24 60.64,37.15 60.01,37.78 56.83,37.78 55.56,39.05 55.56,42.23 54.29,43.5 54.29,46.25 FDV303N2.3
LED_STRIPE1
  Bottom 0.305: IC4.22 51.35,98.11
  Bottom 0.406: 51.35,98.11 52.7,98.11 55.56,95.25 60.01,95.25 60.64,94.62 60.64,92.71 60.01,92.08 56.83,92.08 55.56,90.81 55.56,87.63 54.29,86.36 54.29,83.6 FDV303N5.3
MISO  (via drill 0.6 pad 1.68)
  Top 0.305: 49.94,26.04 IC1.16 49.79,26.09
  Top 0.406: S1.8 67.31,39.37 62.55,34.61 62.55,25.72 60.33,23.49 v55.88,23.49 | U1.13 42.27,14.34 43.5,15.56 46.35,15.56 52.39,21.59 v52.39,23.49 49.79,26.09
  Bottom 0.406: v52.39,23.49 v55.88,23.49
MISO1  (via drill 0.6 pad 1.68)
  Top 0.406: v52.39,106.36 v55.88,106.36
  Bottom 0.305: 49.94,103.82 IC4.16 49.79,103.77
  Bottom 0.406: S2.8 67.31,90.49 62.55,95.25 62.55,104.14 60.33,106.36 v55.88,106.36 | U2.13 42.27,115.52 43.5,114.3 46.35,114.3 52.39,108.27 v52.39,106.36 49.79,103.77
MOSI  (via drill 0.6 pad 1.68)
  Top 0.406: IC1.15 48.99,25.3 50.16,24.13 v50.16,22.22 50.16,20.95 46.35,17.14 42.23,17.14 41.42,16.34 U1.14 | v55.88,21.27 61.91,21.27 63.5,22.86 63.5,33.97 66.67,37.15 71.75,37.15 72.39,37.78 72.39,46.35 71.75,46.99 S1.5
  Bottom 0.305: v50.16,22.22 50.16,21.91
  Bottom 0.406: 50.16,21.91 50.8,21.27 v55.88,21.27
MOSI1  (via drill 0.6 pad 1.68)
  Top 0.305: v50.16,107.63 50.16,107.95
  Top 0.406: 50.16,107.95 50.8,108.59 v55.88,108.59
  Bottom 0.406: IC4.15 48.99,104.55 50.16,105.73 v50.16,107.63 50.16,108.9 46.35,112.71 42.23,112.71 41.42,113.52 U2.14 | v55.88,108.59 61.91,108.59 63.5,107 63.5,95.89 66.67,92.71 71.75,92.71 72.39,92.08 72.39,83.5 71.75,82.87 S2.5
N$1  (via drill 0.6 pad 1.68)
  Top 0.254: C1.1 87.91,37.96
  Top 0.305: IC3.1 87.65,35.56
  Top 0.61: C1.1 88.05,35.3 IC3.1 | v85.72,35.56 85.72,35.3 IC3.1 | IC3.1 87.95,35.26 87.95,33.97 87,33.02 75.88,33.02 72.71,29.84 72.71,27.94 73.66,26.99 76.76,26.99 FDV303N.2
  Bottom 0.61: v85.72,35.56 C13.+
N$2  (via drill 0.6 pad 1.68)
  Top 0.406: IC1.18 52.8,28.48 53.34,27.94 v53.34,26.67
  Bottom 0.406: L1.2 v53.34,26.67
N$3  (via drill 0.6 pad 1.68)
  Top 0.61: v85.72,94.3 C29.+
  Bottom 0.254: C8.1 87.91,91.9
  Bottom 0.305: IC6.1 87.65,94.3
  Bottom 0.61: C8.1 88.05,94.56 IC6.1 | v85.72,94.3 85.72,94.56 IC6.1 | IC6.1 87.95,94.6 87.95,95.89 87,96.84 75.88,96.84 72.71,100.01 72.71,101.92 73.66,102.87 FDV303N3.2
N$4  (via drill 0.6 pad 1.68)
  Top 0.61: R2.1 87.21,50.16 v87.95,50.16
  Bottom 0.61: U$2.1 92.39,54.29 90.81,54.29 89.53,53.02 89.53,51.44 88.27,50.16 v87.95,50.16
N$5  (via drill 0.6 pad 1.68)
  Top 0.61: R3.1 85.09,44.45 86.68,46.04 v87.95,46.04
  Bottom 0.61: U$2.5 90.49,49.53 88.9,47.94 88.9,46.35 88.58,46.04 v87.95,46.04
N$6  (via drill 0.6 pad 1.68)
  Top 0.61: R4.1 85.41,41.91 87.31,43.81 v87.95,43.81
  Bottom 0.61: v87.95,43.81 89.85,43.81 90.49,44.45 90.49,46.35 91.12,46.99 U$2.7
N$7  (via drill 0.6 pad 1.68)
  Top 0.61: R5.1 85.41,39.37 87.63,41.59 v87.95,41.59
  Bottom 0.61: v87.95,41.59 90.81,41.59 92.71,43.5 U$2.9
N$8
  Top 0.813: FDV303N1.1 64.8,19.07 65.41,19.68 R1.1
N$9
  Bottom 0.406: R6.2 34.29,47.62 33.02,48.89 SV2.1
N$10
  Bottom 0.406: SV2.2 31.75,53.98 31.43,53.66 31.11,53.34 31.11,48.26 31.75,47.62 R7.2
N$11  (via drill 0.6 pad 1.68)
  Top 0.406: R8.2 v50.16,46.04
  Bottom 0.406: v50.16,46.04 48.58,44.45 37.47,44.45 36.2,45.72 36.2,48.26 35.56,48.89 SV2.3
N$12  (via drill 0.6 pad 1.68)
  Top 0.305: 46.99,45.72 R9.2
  Top 0.406: 46.99,45.72 46.99,46.67 49.53,49.21 v49.53,50.48
  Bottom 0.406: SV2.4 35.56,55.88 37.15,57.47 48.26,57.47 51.44,54.29 51.44,51.12 50.8,50.48 v49.53,50.48
N$13  (via drill 0.6 pad 1.68)
  Top 0.406: R10.2 v43.81,46.04
  Bottom 0.406: v43.81,46.04 43.81,46.99 43.18,47.62 40.01,47.62 38.1,49.53 SV2.5
N$14
  Top 0.406: IC1.7 41.18,28.48 39.37,26.67 34.92,26.67 1MHZ.2 31.27,28.57 C6.2
N$15
  Top 0.305: 38.58,22.22 1MHZ.1
  Top 0.406: IC1.8 41.65,27.68 40.01,26.04 40.01,23.65 1MHZ.1 | C5.2 34.92,23.49 36.2,22.22 38.58,22.22
N$16  (via drill 0.6 pad 1.68)
  Top 0.406: v49.53,53.02 48.26,53.02 47.31,52.07 47.31,49.53 45.72,47.94 41.27,47.94 40.64,47.31 R11.2
  Bottom 0.406: SV2.6 38.1,55.24 39.37,56.52 46.99,56.52 49.53,53.98 v49.53,53.02
N$17  (via drill 0.6 pad 1.68)
  Top 0.406: R12.2 37.47,48.26 38.1,48.89 45.09,48.89 45.72,49.53 v45.72,53.98
  Bottom 0.406: SV2.8 40.64,54.93 41.27,55.56 45.09,55.56 45.72,54.93 v45.72,53.98
N$18
  cutout Top: 35.88,9.53 35.88,-0.32 47.62,-0.32 47.62,7.3 45.72,9.53
N$19  (via drill 0.6 pad 1.68)
  Top 0.61: U$5.1 92.39,75.57 90.81,75.57 89.53,76.84 89.53,78.42 88.27,79.69 v87.95,79.69
  Bottom 0.61: R21.1 87.21,79.69 v87.95,79.69
N$20  (via drill 0.6 pad 1.68)
  Top 0.61: U$5.5 90.49,80.33 88.9,81.92 88.9,83.5 88.58,83.82 v87.95,83.82
  Bottom 0.61: R22.1 85.09,85.41 86.68,83.82 v87.95,83.82
N$21
  Top 0.254: 11.2,20.34 R18.1
  Top 0.61: U1.1 11.2,20.34
N$22  (via drill 0.6 pad 1.68)
  Top 0.61: v87.95,86.04 89.85,86.04 90.49,85.41 90.49,83.5 91.12,82.87 U$5.7
  Bottom 0.61: R24.1 85.41,87.95 87.31,86.04 v87.95,86.04
N$23  (via drill 0.6 pad 1.68)
  Top 0.813: FDV303N1.2 60.97,18.11 60.33,17.46 60.33,14.92 59.37,13.97 v58.74,13.97
  Bottom 1.27: JP1.RING 53.34,9.84 53.34,12.38 54.93,13.97 v58.74,13.97
N$24  (via drill 0.5 pad 1.68)
  Top 0.406: FDV303N2.2 57.4,45.66 v58.1,45.72
  Bottom 0.406: v58.1,45.72 58.1,47.31 60.96,50.16 62.55,50.16 63.5,51.12 63.5,52.39 JP3.RING
N$25
  Top 0.61: FDV303N2.1 55.47,47.94 60.96,47.94 62.02,48.16 R19.1
N$26
  Top 0.406: IC1.20 53.58,30.08 54.4,30.9 C19.1
N$27  (via drill 0.6 pad 1.68)
  Top 0.305: D2.1 87.91,22.38 IC2.1 87.95,22.56
  Top 0.61: D1.1 87.95,24.13 | 87.95,24.13 87.95,22.56 arc90 IC2.1 87.33,23.18 v85.09,23.18 | C3.1 89.32,24.13 87.95,24.13 | v85.09,23.18 85.09,26.67 84.45,27.3 79.38,27.3 79.06,26.99 | R13.2 74.51,24.34 75.25,25.08 77.79,25.08 79.06,26.35 79.06,26.99 | v85.09,23.18 83.82,21.91 83.82,12.7 85.72,10.8 94.3,10.8 101.28,17.78 101.28,30.16 U$1.P$POS | 79.06,26.99 79.06,28.03 FDV303N.1
  Bottom 0.61: C15.+ 83.19,23.18 v85.09,23.18
N$28
  Top 0.305: U1.10 33.56,8.25
  Top 1.016: 33.56,8.25 41.27,8.25 PAD1.1
N$29
  Top 0.254: 78.79,47.16 S1.4
  Top 0.61: S1.4 R2.2 82.23,47.09 82.23,48.58 82.87,49.21 D6.C
N$30
  Top 0.406: D5.C 79.96,49.37
  Top 0.61: R3.2 S1.3 77.47,44.45 76.2,45.72 76.2,48.26 77.31,49.37 79.96,49.37
N$31
  Top 0.406: S1.2 76.2,41.91 75.56,41.27 75.56,38.1 74.93,37.46 73.66,37.46 72.39,36.2 68.58,36.2 67.94,35.56 D4.C
  Top 0.61: R4.2 S1.2
N$32
  Top 0.406: S1.1 77.47,39.37 76.83,38.73 76.83,36.83 76.2,36.2 74.3,36.2 72.82,34.72 D3.C
  Top 0.61: R5.2 S1.1
N$33  (via drill 0.6 pad 1.68)
  Top 0.61: v87.95,88.27 90.81,88.27 92.71,86.36 U$5.9
  Bottom 0.61: R25.1 85.41,90.49 87.63,88.27 v87.95,88.27
N$34
  Bottom 0.406: IC4.7 41.18,101.38 39.37,103.19 34.92,103.19 1MHZ1.2 31.27,101.28 C24.2
N$35
  Bottom 0.305: 38.58,107.63 1MHZ1.1
  Bottom 0.406: IC4.8 41.65,102.18 40.01,103.82 40.01,106.2 1MHZ1.1 | C23.2 34.92,106.36 36.2,107.63 38.58,107.63
N$36
  Bottom 0.254: 11.2,109.52 R38.1
  Bottom 0.61: U2.1 11.2,109.52
N$37  (via drill 0.6 pad 1.68)
  Top 1.27: JP2.RING 53.34,120.02 53.34,117.48 54.93,115.89 v58.74,115.89
  Bottom 0.813: FDV303N4.2 60.97,111.75 60.33,112.4 60.33,114.94 59.37,115.89 v58.74,115.89
N$38  (via drill 0.5 pad 1.68)
  Top 0.406: v58.1,84.14 58.1,82.55 60.96,79.69 62.55,79.69 63.5,78.74 63.5,77.47 JP4.RING
  Bottom 0.406: FDV303N5.2 57.4,84.2 v58.1,84.14
N$39
  Bottom 0.61: FDV303N5.1 55.47,81.92 60.96,81.92 62.02,81.7 R39.1
N$40
  Bottom 0.813: FDV303N4.1 64.8,110.78 65.41,110.17 R20.1
N$41  (via drill 0.6 pad 1.68)
  Top 0.61: C31.+ 83.19,106.68 v85.09,106.68
  Bottom 0.305: D12.1 87.91,107.47 IC5.1 87.95,107.3
  Bottom 0.61: D11.1 87.95,105.73 | 87.95,105.73 87.95,107.3 arc-90 IC5.1 87.33,106.68 v85.09,106.68 | C21.1 89.32,105.73 87.95,105.73 | v85.09,106.68 85.09,103.19 84.45,102.55 79.38,102.55 79.06,102.87 | R33.2 74.51,105.51 75.25,104.78 77.79,104.78 79.06,103.51 79.06,102.87 | v85.09,106.68 83.82,107.95 83.82,117.16 85.72,119.06 94.3,119.06 101.28,112.08 101.28,99.7 U$4.P$POS | 79.06,102.87 79.06,101.83 FDV303N3.1
N$42  (via drill 0.6 pad 1.68)
  Top 0.406: L2.2 v53.34,103.19
  Bottom 0.406: IC4.18 52.8,101.38 53.34,101.92 v53.34,103.19
N$43
  Bottom 0.406: IC4.20 53.58,99.78 54.4,98.96 C35.1
N$44
  Bottom 0.305: U2.10 33.56,121.6
  Bottom 1.016: 33.56,121.6 41.27,121.6 PAD2.1
  pour Bottom (isolate 0.406): 37.15,121.29 43.81,121.6 45.4,123.19 45.4,128.91 37.47,128.91 37.15,127.95
  cutout Bottom: 46.67,129.54 46.67,122.24 44.77,120.33 36.2,120.33 35.88,120.65 35.88,130.81 36.51,130.81 36.83,121.29 37.15,120.97 43.81,120.97 45.72,122.87 45.72,130.49 46.67,130.49 46.67,129.22
N$45
  Top 0.406: R26.2 34.29,82.23 33.02,80.96 SV1.1
N$46
  Top 0.406: SV1.2 31.75,75.88 31.11,76.52 31.11,81.6 31.75,82.23 R27.2
N$47  (via drill 0.6 pad 1.68)
  Top 0.406: v50.16,83.82 48.58,85.41 37.47,85.41 36.2,84.14 36.2,81.6 35.56,80.96 SV1.3
  Bottom 0.406: R28.2 v50.16,83.82
N$48  (via drill 0.6 pad 1.68)
  Top 0.406: SV1.4 35.56,73.98 37.15,72.39 48.26,72.39 51.44,75.57 51.44,78.74 50.8,79.38 v49.53,79.38
  Bottom 0.305: 46.99,84.14 R29.2
  Bottom 0.406: 46.99,84.14 46.99,83.19 49.53,80.65 v49.53,79.38
N$49  (via drill 0.6 pad 1.68)
  Top 0.406: v43.81,83.82 43.81,82.87 43.18,82.23 40.01,82.23 38.1,80.33 SV1.5
  Bottom 0.406: R30.2 v43.81,83.82
N$50  (via drill 0.6 pad 1.68)
  Top 0.406: SV1.6 38.1,74.61 39.37,73.34 46.99,73.34 49.53,75.88 v49.53,76.84
  Bottom 0.406: v49.53,76.84 48.26,76.84 47.31,77.79 47.31,80.33 45.72,81.92 41.27,81.92 40.64,82.55 R31.2
N$51  (via drill 0.6 pad 1.68)
  Top 0.406: SV1.8 40.64,74.93 41.27,74.3 45.09,74.3 45.72,74.93 v45.72,75.88
  Bottom 0.406: R32.2 37.47,81.6 38.1,80.96 45.09,80.96 45.72,80.33 v45.72,75.88
N$52
  Bottom 0.254: 78.79,82.7 S2.4
  Bottom 0.61: S2.4 R21.2 82.23,82.77 82.23,81.28 82.87,80.65 D8.C
N$53
  Bottom 0.406: D7.C 79.96,80.49
  Bottom 0.61: R22.2 S2.3 77.47,85.41 76.2,84.14 76.2,81.6 77.31,80.49 79.96,80.49
N$54
  Bottom 0.406: S2.2 76.2,87.95 75.56,88.58 75.56,91.76 74.93,92.39 73.66,92.39 72.39,93.66 68.58,93.66 67.94,94.3 D10.C
  Bottom 0.61: R24.2 S2.2
N$55
  Bottom 0.406: S2.1 77.47,90.49 76.83,91.12 76.83,93.03 76.2,93.66 74.3,93.66 72.82,95.14 D9.C
  Bottom 0.61: R25.2 S2.1
RESET  (via drill 0.5 pad 1.68, 0.6 pad 1.68)
  Top 0.406: IC1.29 46.59,37.87 45.72,38.73 v45.4,38.73 | S1.6 68.26,44.45 65.72,41.91 | 65.72,41.91 63.5,39.69 R23.1 | v58.74,41.91 65.72,41.91
  Bottom 0.406: v45.4,38.73 45.72,38.73 46.59,37.87 IC1.29 47.07,34.29 53.34,34.29 55.24,36.2 55.24,39.37 57.78,41.91 v58.74,41.91
RESET1  (via drill 0.5 pad 1.68, 0.6 pad 1.68)
  Top 0.406: v45.4,91.12 45.72,91.12 46.59,91.99 IC4.29 47.07,95.57 53.34,95.57 55.24,93.66 55.24,90.49 57.78,87.95 v58.74,87.95
  Bottom 0.406: IC4.29 46.59,91.99 45.72,91.12 v45.4,91.12 | S2.6 68.26,85.41 65.72,87.95 | 65.72,87.95 63.5,90.17 R40.1 | v58.74,87.95 65.72,87.95
SCK
  Top 0.406: 53.98,25.08 60.01,25.08 61.59,26.67 61.59,35.24 68.26,41.91 S1.7 | U1.12 43.18,12.34 44.5,13.65 46.35,13.65 53.98,21.27 53.98,25.08 | IC1.17 51.28,25.87 52.07,25.08 53.98,25.08
SCK1
  Bottom 0.406: 53.98,104.78 60.01,104.78 61.59,103.19 61.59,94.62 68.26,87.95 S2.7 | U2.12 43.18,117.52 44.5,116.21 46.35,116.21 53.98,108.59 53.98,104.78 | IC4.17 51.28,103.99 52.07,104.78 53.98,104.78
SS
  Top 0.406: U1.15 40.01,18.34 40.4,18.73 46.04,18.73 48.58,21.27 48.58,23.49 48.19,23.88 IC1.14
SS1
  Bottom 0.406: U2.15 40.01,111.52 40.4,111.12 46.04,111.12 48.58,108.59 48.58,106.36 48.19,105.98 IC4.14
SWITCH_DOWN  (via drill 0.6 pad 1.68)
  Top 0.305: IC1.11 45.72,26.12
  Top 0.406: 45.72,26.12 45.72,23.81 45.09,23.18 45.09,20.95 v44.45,20.32
  Bottom 0.406: v44.45,20.32 35.24,20.32 22.86,32.7 22.86,41.59 21.59,42.86 15.24,42.86 13.97,44.13 13.97,48.26 14.61,48.89 SV3.2 R15.1
SWITCH_DOWN1  (via drill 0.6 pad 1.68)
  Top 0.406: v44.45,109.54 35.24,109.54 22.86,97.16 22.86,88.27 21.59,87 15.24,87 13.97,85.73 13.97,81.6 14.61,80.96 SV4.2 R35.1
  Bottom 0.305: IC4.11 45.72,103.74
  Bottom 0.406: 45.72,103.74 45.72,106.05 45.09,106.68 45.09,108.9 v44.45,109.54
SWITCH_OK  (via drill 0.6 pad 1.68)
  Top 0.406: IC1.10 44.99,24.35 v43.5,22.86 | v20.95,53.66 24.77,49.85 v24.77,41.59
  Bottom 0.406: v43.5,22.86 34.92,22.86 24.45,33.34 24.45,39.37 24.77,39.69 v24.77,41.59 | R16.1 SV3.4 18.41,53.66 v20.95,53.66
SWITCH_OK1  (via drill 0.6 pad 1.68)
  Top 0.406: v43.5,107 34.92,107 24.45,96.52 24.45,90.49 24.77,90.17 v24.77,88.27 | R36.1 SV4.4 18.41,76.2 v20.95,76.2
  Bottom 0.406: IC4.10 44.99,105.51 v43.5,107 | v20.95,76.2 24.77,80.01 v24.77,88.27
SWITCH_UP  (via drill 0.6 pad 1.68)
  Top 0.406: IC1.9 43.33,26.19 v42.55,25.4
  Bottom 0.406: v42.55,25.4 35.24,25.4 28.26,32.38 28.26,51.44 25.93,53.76 R17.1 23.5,49.85 22.54,48.89 SV3.6
SWITCH_UP1  (via drill 0.6 pad 1.68)
  Top 0.406: v42.55,104.46 35.24,104.46 28.26,97.47 28.26,78.42 25.93,76.1 R37.1 23.5,80.01 22.54,80.96 SV4.6
  Bottom 0.406: IC4.9 43.33,103.67 v42.55,104.46
TSAL_ENABLE  (via drill 0.6 pad 1.68)
  Top 0.406: IC1.13 47.39,24.85 46.67,24.13 46.67,22.54 v46.99,22.22
  Top 0.61: FDV303N1.3 60.36,20.04 59.37,19.05 v55.88,19.05
  Bottom 0.406: v55.88,19.05 50.16,19.05 v46.99,22.22
TSAL_ENABLE1  (via drill 0.6 pad 1.68)
  Top 0.406: v55.88,110.81 50.16,110.81 v46.99,107.63
  Bottom 0.406: IC4.13 47.39,105.01 46.67,105.73 46.67,107.32 v46.99,107.63
  Bottom 0.61: FDV303N4.3 60.36,109.82 59.37,110.81 v55.88,110.81
TSOP_OUT  (via drill 0.6 pad 1.68)
  Top 0.406: IC1.32 43.33,34.77 40.64,37.46 37.47,37.46 34.92,40.01 12.7,40.01 9.53,36.83 v7.62,36.83
  Bottom 0.305: 7.62,34.28 TSOP.OUT
  Bottom 0.406: v7.62,36.83 7.62,34.28
TSOP_OUT1  (via drill 0.6 pad 1.68)
  Top 0.305: 7.62,95.58 TSOP1.OUT
  Top 0.406: v7.62,93.03 7.62,95.58
  Bottom 0.406: IC4.32 43.33,95.09 40.64,92.39 37.47,92.39 34.92,89.85 12.7,89.85 9.53,93.03 v7.62,93.03

## Text on the board
Top: J.Trzyna / M. Szlachetka
Bottom: J.Trzyna / M. Szlachetka